# Altium PCB MRX80SAQUARE.PcbDoc
Units mm, origin at the board's own origin, x right, y up, seen from the top; angles counter-clockwise.
Board outline 25.65 x 25.65 mm, 2 copper layers (Top Layer, Bottom Layer); 40 components, 25 nets, 98 pads, 16 vias.
Unrouted connection lines stored in the file: 1.
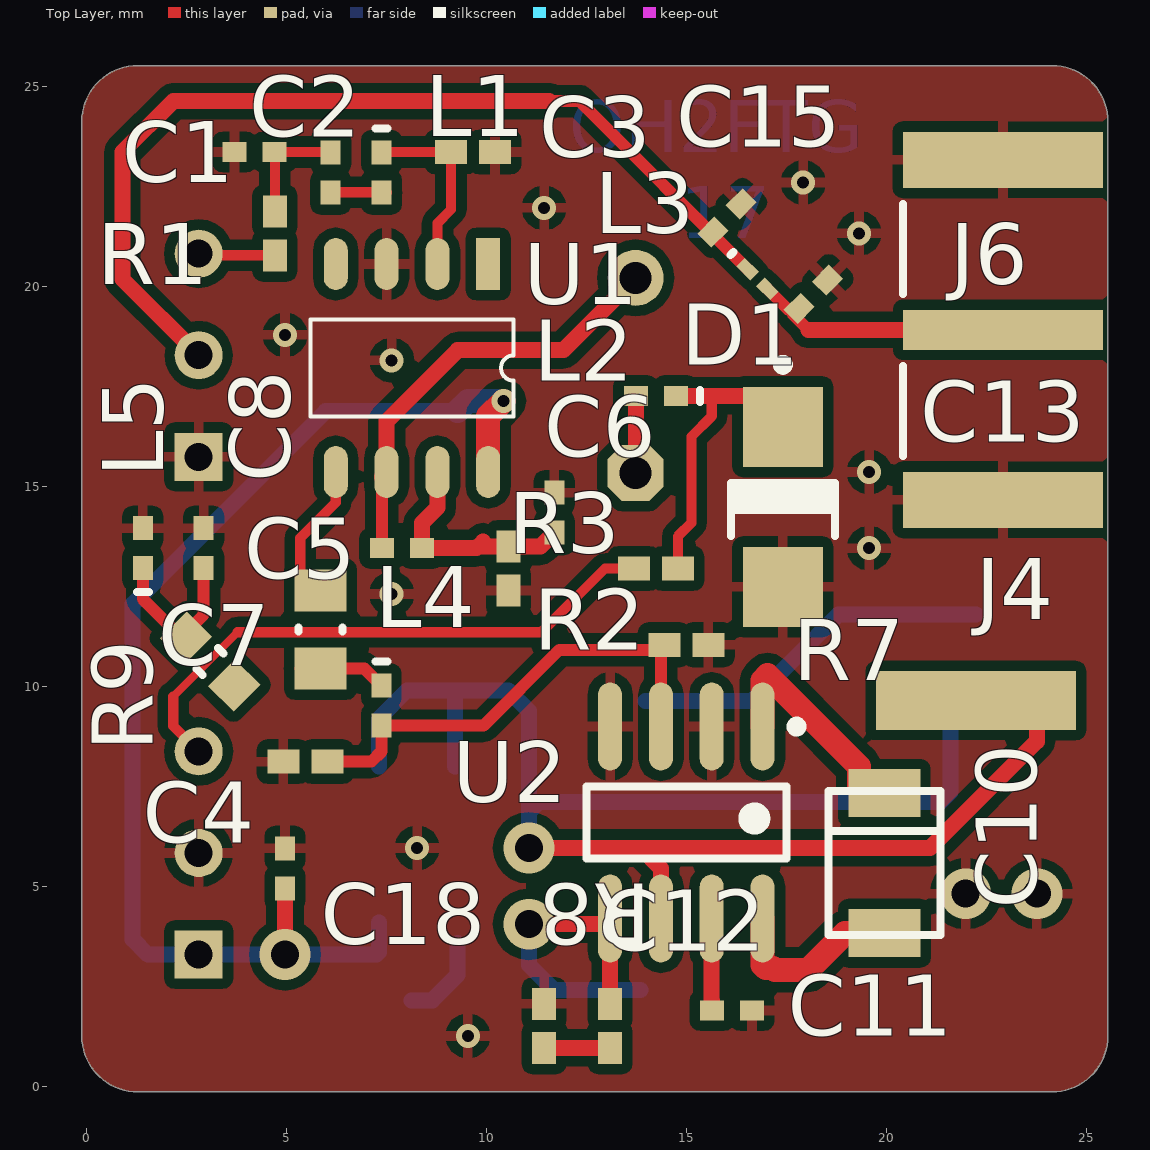
[diagram p0: Top Layer view]
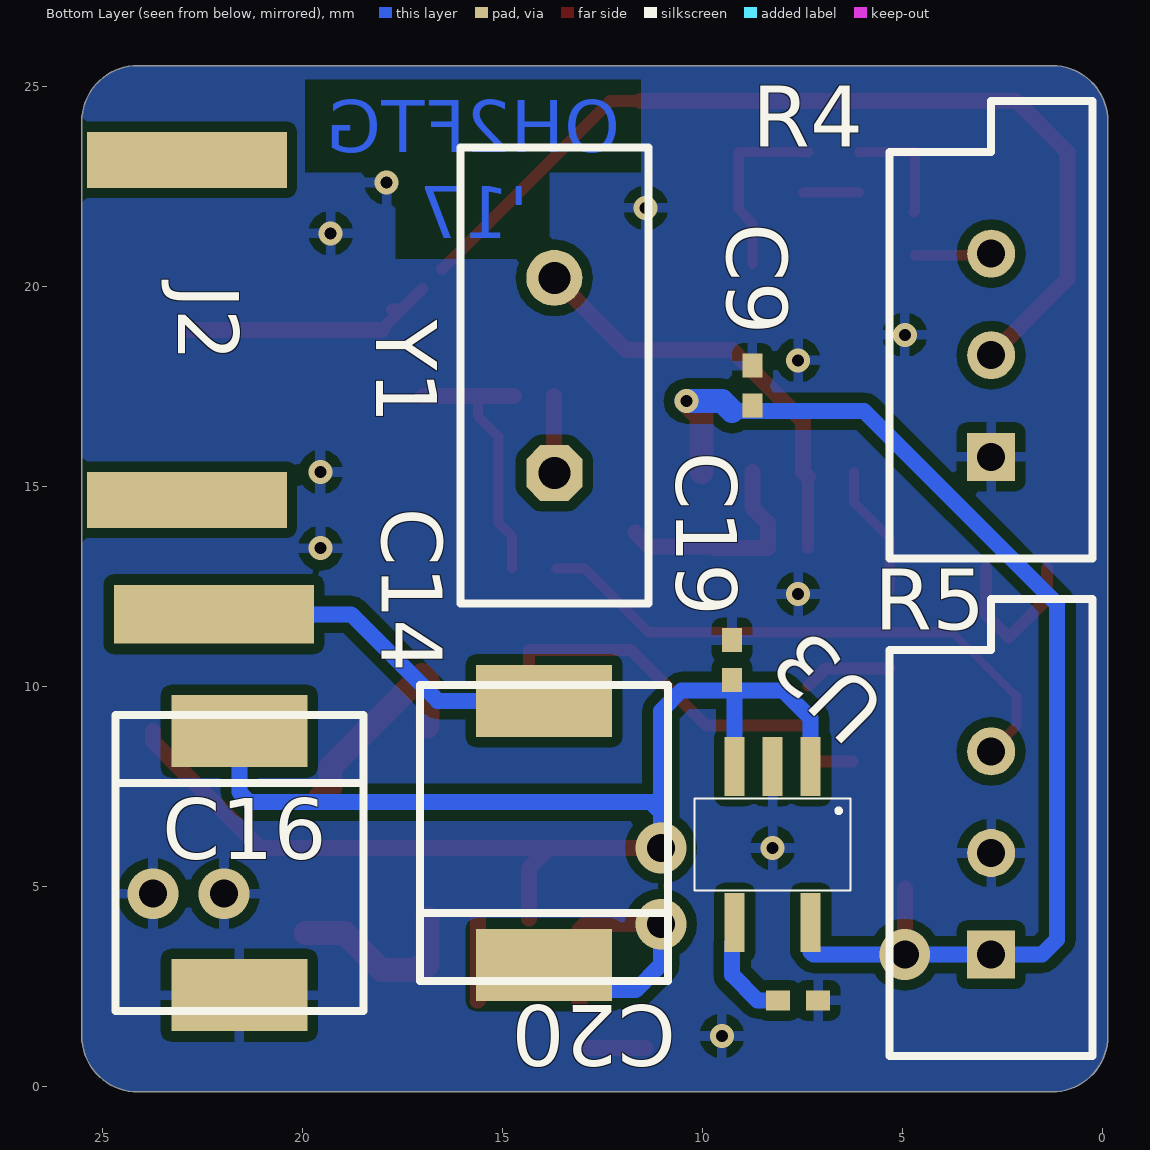
[diagram p1: Bottom Layer view, seen from below]

## Layer stack, top to bottom
Top Solder: solder mask 0.0102, Solder Resist, Dk 3.5
Top Layer: signal copper 0.0356
Dielectric 1: dielectric 0.32, FR-4, Dk 4.8
Bottom Layer: signal copper 0.0356
Bottom Solder: solder mask 0.0102, Solder Resist, Dk 3.5

## Board outline
-0.127,1.27 -0.127,24.13 cw(c1.27,24.13) 1.27,25.527 24.13,25.527 cw(c24.13,24.13) 25.527,24.13 25.527,1.27 cw(c24.13,1.27) 24.13,-0.127 1.27,-0.127 cw(c1.27,1.27)

## Design rules (kind name [scope] priority, off if disabled: settings)
Clearance [All] p1: gap=0.254 ignorepadtopadclearanceinfootprint=FALSE except(0: Arc-Hole Track-Hole SMDPad-Hole THPad-Hole Via-Hole Fill-Hole Poly-Hole Region-Hole Text-Hole)
PolygonConnect [All] p1: connectstyle=Relief reliefconductorwidth=0.254 reliefentries=4 polygonreliefangle="90 Angle" airgapwidth=0.254
RoomDefinition MRX80SQUARE [InComponentClass('MRX80SQUARE')] p1: confinementstyle=ConfineIn formatcopy=TRUE lockcomponents=FALSE outline 42.164,1.397 82.55,1.397 82.55,19.05 42.164,19.05
RoutingVias [All] p1: holewidth=0.711 width=1.27 viastyle="Through Hole" minholewidth=0.711 minwidth=1.27 maxholewidth=0.711 maxwidth=1.27
SolderMaskExpansion [All] p1: expansion=0.102
Width [All] p1: maxlimit=6.254 minlimit=0.254 preferedwidth=0.254
30 further rules are at their usual default settings.

## Components (designator, comment, footprint, x,y, rotation, side; value= is the part's Value field where it differs from the comment)
C1 "Cap Semi" 0402 4.191,23.368 r0 top value=910pF
C2 "Cap Semi" 0402 6.096,22.86 r270 top value=180pF
C3 "Capacitor" CAPC1005X04N_0402 9.652,23.368 r180 top value=100n
C4 "Capacitor" CAPC1005X04N_0402 5.461,8.128 r180 top value=100n
C5 "Cap Semi" 0402 7.874,13.462 r0 top value=270pF
C6 "Cap Semi" 0402 11.684,14.351 r270 top value=82pF
C7 "Capacitor" CAPC2012X06N_0806 5.842,11.43 r90 top value=100n
C8 "Cap Semi" 0402 2.921,13.462 r90 top value=390pF
C9 "Cap Semi" 0402 8.763,17.526 r90 bottom value=2.2uF
C10 "Capacitor" CAP_CASE_B_1210_m3225 19.939,5.588 r270 top value=10u
C11 "Cap Semi" 0402 16.129,1.905 r0 top value=2.2uF
C12 "Capacitor" CAPC1005X04N_0402 13.081,1.524 r90 top value=100n
C13 "Cap Semi" 0402 18.161,19.812 r225 top value=820pF
C14 "Capacitor" CAP_CASE_V_2924_m7361-38 13.97,6.348 r90 bottom value=100u
C15 "Cap Semi" 0402 16.002,21.717 r225 top value=820pF
C16 "Capacitor" CAP_CASE_V_2924_m7361-38 21.59,5.588 r270 bottom value=100u
C18 "Cap Semi" 0402 4.953,5.461 r270 top value=2.2uF
C19 "Cap Semi" 0402 9.271,10.668 r270 bottom value=2.2uF
C20 "Cap Semi" 0402 7.62,2.159 r0 bottom value=10nF
D1 "MRA4007T3" ONSC-SMA-2-403D-02_V 17.399,14.499 r270 top
J2 "pad_smd" pad_smd_bodge 22.225,11.811 r0 bottom
J4 "pad_smd" pad_smd_bodge 22.225,9.652 r0 top
J6 "SMA" ROS-32K145-400L5_V 25.4,18.923 r270 top
L1 "Inductor" 0402-A 7.366,22.86 r270 top value=1.3uH
L2 "Inductor" 0402-A 14.224,17.272 r180 top value=15uH
L3 "Inductor" 0603 16.764,20.193 r315 top value=2.2uH
L4 "Inductor" 0402-A 7.366,9.525 r270 top value=15uH
L5 "Inductor" 0402-A 1.397,13.462 r90 top value=1.3uH
R1 "Resistor" RESC1005X04N_0402 4.699,21.336 r90 top value=47ohm
R2 "Resistor" RESC1005X04N_0402 10.541,12.954 r90 top value=10k
R3 "Resistor" RESC1005X04N_0402 14.224,12.954 r180 top value=100k
R4 "RPot" VR5 2.794,18.288 r90 bottom value=10K
R5 "RPot" VR5 2.794,5.842 r90 bottom value=10K
R7 "Resistor" RESC1005X04N_0402 14.986,11.049 r180 top value=10k
R8 "Resistor" RESC1005X04N_0402 11.43,1.524 r270 top value=10k
R9 "Resistor" RESC1608X06N_0603 3.082,10.634 r315 top value=1.5k
U1 "SA612AD" SO8_SOIC8 10.033,20.567 r270 top
U2 "LM386M-1" M08A_N 14.986,6.604 r270 top
U3 "LP2985IM5-6.1/NOPB" SOT23-5 7.305,8.001 r0 bottom
Y1 "ECS-10-13-1" HC-49U 13.716,17.78 r90 bottom

## Footprints (in the part's own frame and the unit in brackets; to place one, negate y for a bottom-side part, rotate by r counter-clockwise, add the part's x,y. Pads: shape width x height; smd on the part's side, far side on the other; paste and mask are expansions set on the pad)
0402 [mm] "Chip Capacitor, Body 1.0x0.5mm, IPC High Density"
  rect 0.6x0.5 smd: 1(-0.5,0) 2(0.5,0)
  body extent -0.55,-0.3 0.55,0.3, height 1.3
0402-A [mm] "Chip Inductor, Body 1.0x0.5mm, IPC High Density"
  rect 0.6x0.5 smd: 1(-0.5,0) 2(0.5,0)
  silkscreen extent -1.1,-0.15 -1.1,0.15, body extent -0.55,-0.3 0.55,0.3, height 0.55
0603 [mm] "Chip Inductor, Body 0.6x0.3mm, IPC High Density"
  rect 0.5x0.3 smd: 1(-0.35,0) 2(0.35,0)
  silkscreen extent -0.9,-0.05 -0.9,0.05, body extent -0.33,-0.18 0.33,0.18, height 0.55
CAP_CASE_B_1210_m3225 [mm] "Chip Capacitor Case B, 2-Leads, Body 3,5x2,8x1.9mm"
  rect 1.2x1.8 smd: 1(-1.75,0) 2(1.75,0)
  silkscreen extent -1.8,-1.4 1.8,1.4, body extent -1.75,-1.4 1.75,1.4, height 1.9
CAP_CASE_V_2924_m7361-38 [mm]
  rect 1.8x3.4 smd: 1(-3.3,0) 2(3.3,0)
  silkscreen extent -3.7,-3.1 3.7,3.1, body extent -4.05,-3.1 4.05,3.1, height 3.6
CAPC1005X04N_0402 [mm]
  rect 0.8x0.6 smd: 1(-0.55,0) 2(0.55,0)
  body extent -0.52,-0.28 0.53,0.27, height 0.4
CAPC2012X06N_0806 [mm] "Chip Capacitor, 2-Leads, Body 2,00x1,25mm, IPC Medium Density"
  rect 1.05x1.3 smd: 1(-0.975,0) 2(0.975,0)
  silkscreen extent -0.05,-0.55 0.05,0.55, body extent -1.05,-0.67 1.05,0.68, height 0.6
HC-49U [mm] "Quartz Crystal, Thru-Hole; 2 Leads; Body 11.35 x 4.65 x 13.46 mm (LxWxH max)"
  oct 1.4x1.4 hole 0.8: 1(-2.44,0)
  round 1.4 hole 0.8: 2(2.44,0)
  silkscreen extent -5.7,-2.35 5.7,2.35
M08A_N [mm] "SOIC, 8-Leads, Body 4.9x3.9mm, Pitch 1.27mm, IPC Medium Density"
  oval 2.2x0.6 smd: 1(-2.4,1.905) 2(-2.4,0.635) 3(-2.4,-0.635) 4(-2.4,-1.905) 5(2.4,-1.905) 6(2.4,-0.635) 7(2.4,0.635) 8(2.4,1.905)
  silkscreen extent -2.52,-2.5 0.9,2.88, body extent -2,-2.5 2,2.5, height 1.75
ONSC-SMA-2-403D-02_V [mm] "Molded, 2-Leads, Body 4.57x2.92mm"
  rect 2x2 smd: 1(-2,0) 2(2,0)
  silkscreen extent -3.67,-1.3 0.74,1.3, body extent -2.16,-1.3 2.16,1.3, height 2.2
pad_smd_bodge [mm] "A surface only pad for future bodge-wires"
  rect 5x1.473 smd: 1(0,0)
RESC1005X04N_0402 [mm] "Chip Resistor, 2-Leads, Body 1,00x0,50mm, IPC Medium Density"
  rect 0.8x0.6 smd: 1(-0.55,0) 2(0.55,0)
  body extent -0.52,-0.28 0.53,0.27, height 0.4
RESC1608X06N_0603 [mm] "Chip Resistor, 2-Leads, Body 1,60x0,80mm, IPC Medium Density"
  rect 0.9x0.95 smd: 1(-0.85,0) 2(0.85,0)
  silkscreen extent -0.1,-0.38 0.1,0.38, body extent -0.85,-0.45 0.85,0.45, height 0.55
ROS-32K145-400L5_V [mm] "SMA Right Angle Jack, Edge Mount, 14.25x9.5x4.46mm, Rosenberger Recommended"
  rect 1x5 smd: 1(0,-2.5)
  rect 1.4x5 smd: MP(-4.25,-2.5) MP(4.25,-2.5)
  rect 1.4x5 smd far side paste-2: ""(-4.25,-2.5) ""(4.25,-2.5)
  silkscreen extent -3.15,-5 3.15,-5, body extent -4.75,-4.75 4.75,9.5, height 4.46
SO8_SOIC8 [mm]
  rect 1.3x0.6 smd: 1(0,0)
  oval 1.3x0.6 smd: 2(0,-1.27) 3(0,-2.54) 4(0,-3.81) 5(5.2,-3.81) 6(5.2,-2.54) 7(5.2,-1.27) 8(5.2,0)
  silkscreen extent 1.38,-4.44 3.82,0.64
SOT23-5 [mm] "SOT23-5 case"
  rect 0.5x1.473 smd: 1(0,0) 2(0.95,0) 3(1.9,0) 4(1.9,3.9) 5(0,3.9)
  silkscreen extent -1,0.8 2.9,3.1
VR5 [mm] "Thru-Hole; 3 Leads"
  rect 1.2x1.2 hole 0.7: 1(-2.54,0)
  round 1.2 hole 0.7: 2(0,0) 3(2.54,0)
  silkscreen extent -5.08,-2.54 6.35,2.54

## Part data
C1 C2 C5 C6 C8 C9 C11 C13 C15 C18 C19 C20: "Capacitor (Semiconductor SIM Model)", LatestRevisionDate=29-May-2009, LatestRevisionNote="IPC-7351 Footprint Added.", PackageDescription="Chip Capacitor", PackageReference=C1206, Published=8-Jun-2000, Publisher="Altium Limited"
C3 C4 C12: library part Capacitor_100n_0402_Bulk, "Class 1 SMD Capacitor", Manufacturer=MULTICOMP, ManufacturerRef=MC0402B104K250CT, PowerRating=N.A., TemperatureCoeff="± 15%", Tolerance="± 10%", Voltage=25V, OrderCode=2310482, PackageDescription=SMD, PackageReference=SMD-0402, PriceEuro=0.0055, Published=9.5.2014, Publisher=atr, Seller=Farnell, Type=X7R
C7: library part Capacitor_47n_0805_C0G, "Class 1 SMD Capacitor", Manufacturer=Kemet, ManufacturerRef=C0805C473J3GACTU, PowerRating=N.A., TemperatureCoeff="0ppm/°C ± 30ppm/°C", Tolerance="± 5%", Voltage=25V, OrderCode=1535570RL, PackageDescription=SMD, PackageReference=SMD-0805, PriceEuro=0.28, Published=9.5.2014, Publisher=atr, Seller=Farnell, Type="C0G / NP0"
C10: library part Capacitor_100u_Tant_SMD_CASE_B_m3525, "Tant SMD Capacitor", Manufacturer=AVX, ManufacturerRef=TPSB107M010R0400, PowerRating=N.A., TemperatureCoeff=-, TemperatureRange="-55°C to +125°C", Tolerance="± 20%", Voltage=15V, ESR=0.4Ohm, OrderCode=1658510RL, PackageDescription="CASE B", PackageReference="SMD-1210 [3225 Metric]", PriceEuro=0.89, Published=15.5.2014, Publisher=atr, Seller=Farnell, Type=Tant
C14 C16: library part Capacitor_100u_Tant_SMD_CASE_V_m7361, "Tant SMD Capacitor", Manufacturer=AVX, ManufacturerRef=TPSV107K025R0100, PowerRating=N.A., TemperatureCoeff=-, TemperatureRange="-55°C to +125°C", Tolerance="± 20%", Voltage=25V, ESR=0.1Ohm, LatestRevisionDate=3.9.2014, LatestRevisionNote=3.9.2014, OrderCode=1659002, PackageDescription="CASE V", PackageReference="SMD-2924 [7361 Metric]", PriceEuro=4.94, Published=3.9.2014, Publisher=atr, Seller=Farnell, Type=Tant
D1: "Surface Mount Standard Recovery Power Rectifier, 2-Pin SMA, Tape and Reel", Manufacturer="On Semiconductor", Supplier Part Number 1=MRA4007T3OSTR-ND, ComponentLink1Description="Manufacturer URL", ComponentLink1URL=http://www.onsemi.com/, ComponentLink2Description=Datasheet, ComponentLink2URL=http://www.onsemi.com/pub_link/Collateral/MRA4003T3-D.PDF, ComponentLink3Description="Package Specification", ComponentLink3URL=http://www.onsemi.com/pub_link/Collateral/403D-02.PDF, DatasheetVersion="Rev. 9", IFSM Max (A)=30, IO(rec) Max (A)=1, Mounting Technology="Surface Mount", PackageDescription="2-Pin Small Molded Package, J-Bend Lead, Body 2.605 x 4.315 mm", PackageReference=SMA-2-403D-02, PackageVersion="Rev. G, 07/2012", Packing="Tape and Reel", PartNumber=MRA4007T3, RoHS=FALSE, Supplier 1=Digi-Key, Supplier 2=Digi-Key, Supplier 3=Digi-Key, Supplier Part Number 2=MRA4007T3OSCT-ND, Supplier Part Number 3=MRA4007T3OSDKR-ND, Type="Standard Recovery", VRRM Max (V)=1000
J2 J4: library part pad_smd_1mm*2mm, "1mm * 2mm smd pad"
J6: library part 32K145-400L5, "SMA Right Angle Jack, Edge Mount, Up to 18 GHz, -55 to 155 degC", ComponentLink1Description="Manufacturer URL", ComponentLink1URL=http://www.rosenberger.de, ComponentLink2Description=Datasheet, ComponentLink2URL=http://rosenberger.de/ok/images/documents/db/32K145-400L5.pdf, ComponentLink3Description="Package Specification", ComponentLink3URL=http://rosenberger.de/ok/images/documents/db/32K145-400L5.pdf, ComponentLink4Description="Series Overview / Design Note", ComponentLink4URL=http://rosenberger.de/ok/images/documents/spez/32.pdf, ComponentLink5Description="Webshop / RFQ", ComponentLink5URL=http://www.rosenberger.com/en/contact/sales/, DatasheetVersion=b00, Desgin Note 2="For more information about DRC setting, please look at following webpage, http://techdocs.altium.com/display/SCRT/Design+Rule+for+Edge-Mount+Connectors", Design Note 1="Footprint in library is a generic example - only application specific footprint delivers High Performance", Mounting Technology="Surface Mount", PackageDescription="SMA Right Angle Jack, Edge Mount, 14.25 x 9.5 x 4.46 mm", PackageReference=32K145-400L5, PackageVersion=b00, PartNumber=32K145-400L5
R1 R2 R3 R7 R8 R9: library part Resistor_SMD_Generic, "Generic SMD Resistor", Manufacturer=SUSUMU, ManufacturerRef=RR0816P-104-B-T5, PowerRating=63mW, TemperatureCoeff="± 25ppm/°C", Tolerance="± 0.1%", Voltage=75V, OrderCode=1653254RL, PackageDescription=SMD, PackageReference=SMD-0603, PriceEuro=0.085, Publisher=atr, Seller=Farnell, Type="Thin Film"
R4 R5: "Potentiometer", LatestRevisionDate=17-Jul-2002, LatestRevisionNote="Re-released for DXP Platform.", PackageDescription="Variable Resistor, Thru-Hole; 3 Leads", PackageReference=VR5, Published=8-Jun-2000, Publisher="Altium Limited", Set Position=0.5, Sim Note="Enter the Resistance value and the set point into parameter fields."
U1: Input Frequency=500MHz, Manufacturer 1="NXP Semiconductors", Manufacturer Part Number 1=SA612AD/01,118, Operating Temperature (Max)=85C, Operating Temperature (Min)=-40C, Operating Temperature Classification=Industrial, Package Type=SO, Power Gain=17dB, ComponentLink1Description=https://datasheet.ciiva.com/27052/1460068-27052253.pdf, ComponentLink1URL=https://datasheet.ciiva.com/27052/1460068-27052253.pdf, ComponentLink2Description=https://datasheet.ciiva.com/15100/getdatasheetpartid-117259-15100947.pdf, ComponentLink2URL=https://datasheet.ciiva.com/15100/getdatasheetpartid-117259-15100947.pdf, ComponentLink3Description=https://datasheet.ciiva.com/3271/sa612a-3271368.pdf, ComponentLink3URL=https://datasheet.ciiva.com/3271/sa612a-3271368.pdf, Packaging="Tape and Reel", Pricing 1="1=2.34, 10=1.92, 50=1.92, 100=1.54, 1000=1.11, 10000=0.998 (USD)", Stock 1=1993, Supplier 1=Mouser, Supplier Part Number 1=SA612AD
U2: "Low Voltage Audio Power Amplifier, 8-pin Narrow SOIC", Manufacturer="National Semiconductor", PackageTopMarking=NSZXTT*LM386*M-1, PowerWise=N, Code_IPC=SOIC127P600-8, Code_JEDEC=MS-012-AA, ComponentLink1Description="Manufacturer URL", ComponentLink1URL=http://www.national.com/, ComponentLink2Description="LM386 Datasheet", ComponentLink2URL=http://www.national.com/ds/LM/LM386.pdf, ComponentLink3Description="LM386 Web Page", ComponentLink3URL=http://www.national.com/pf/LM/LM386.html, ComponentLink4Description="M08A Package Page", ComponentLink4URL=http://www.national.com/packaging/folders/m08a.html, CompType="Audio IC", DatasheetVersion=Aug-2000, High-Reliability=Y, PackageDescription="SOIC Narrow, 4.9 x 3.9 x 1.45mm, 8 Lead, 1.27mm Pitch", PackageReference=M08A, PackageVersion="revM, May-2009", PartNumber=LM386M-1, PinCount=8, RoHS=N
U3: "6.1V 150mA LDO", Manufacturer 1="Texas Instruments", Maximum Input Voltage="16 V", Maximum Output Current="0.15 A", Minimum Input Voltage="2.5 V", Operating Temperature="-40 to 125 °C", Output Voltage="6.1 V", Package=5SOT-23, Supplier Part Number 1=926-LP2985IM561NOPB, Typical Dropout Voltage @ Current="0.0001@0mA|0.007@1mA|0.04@10mA|0.12@50mA|0.28@150mA V", Accuracy="±3 %", Category="Linear Regulator", ComponentLink1Description=https://datasheet.ciiva.com/6592/lp2985-n-6592025.pdf, ComponentLink1URL=https://datasheet.ciiva.com/6592/lp2985-n-6592025.pdf, ComponentLink2Description=https://datasheet.ciiva.com/26168/lp2985-n-26168191.pdf, ComponentLink2URL=https://datasheet.ciiva.com/26168/lp2985-n-26168191.pdf, ComponentLink3Description=https://datasheet.ciiva.com/6592/lp2985-n-6592022.pdf, ComponentLink3URL=https://datasheet.ciiva.com/6592/lp2985-n-6592022.pdf, ComponentLink4Description=https://datasheet.ciiva.com/13028/lp2985-n-13028680.pdf, ComponentLink4URL=https://datasheet.ciiva.com/13028/lp2985-n-13028680.pdf, Line Regulation="0.014 %/V", Manufacturer Part Number 1=LP2985IM5-6.1/NOPB, Mounting="Surface Mount", Number of Outputs=1, Output Type=Fixed, Packaging="Tape & Reel", Polarity=Positive, Pricing 1="1=0.76, 10=0.632, 50=0.632, 100=0.408, 1000=0.326, 10000=0.265 (USD)", Rad Hard=No, Stock 1=539, Supplier 1=Mouser, Type=Linear
Y1: "Crystal Oscillator", ComponentLink1Description="Manufacturer Link", ComponentLink1URL=http://www.ecsxtal.com/, ComponentLink2Description=Datasheet, ComponentLink2URL=http://www.ecsxtal.com/pdf2/HC49U.PDF, DatasheetDocument=18-Apr-2000, PackageReference=HC-49U, Published=17-Jul-2002, Publisher="Altium Limited"
L1 L2 L3 L4 L5: Code_IEC=1005, Code_JEITA=0402, LatestRevisionDate=29-May-2009, LatestRevisionNote="IPC-7351 Footprint Added.", PackageDescription="Chip Inductor", PackageReference=0402-A, Published=8-Jun-2000, Publisher="Altium Limited"

## Via types
v1: diameter 0.6, hole 0.3, Top Layer to Bottom Layer, 11 vias
v2: diameter 1.27, hole 0.7, Top Layer to Bottom Layer, 5 vias

## Nets (pads, with @x,y where several pads share a name; then routed paths per layer and width w, separated by ;. In a path a pad name is that pad's centre, name@x,y a point inside that pad or via, vN(x,y) a via of type N, cw(c..) or ccw(c..) an arc to the next point about the centre after c; other vN are vias at no path point)
GND: C1.1 C3.1 C4.2 C6.1 C8.2 C9.2 C11.2 C13.1 C15.1 C16.2 C18.1 C19.1 C20.1 D1.2 J6.MP L5.2 R2.1 R4.1 R5.2 R7.1 R8.1 U1.3 U2.2 U2.4 U3.2
  other v1: 9.525,1.27 8.255,5.969 7.62,12.319 19.558,13.462 19.558,15.367 7.62,18.161 4.953,18.796 19.304,21.336 11.43,21.971 17.907,22.606
  other v2: 21.971,4.826 23.749,4.826
NetC1_2: C1.2 C2.1 R1.2 | length 2.9
  Top Layer w0.254: R1.2@4.733,21.852 R1.2 4.699,23.36 C1.2 6.088,23.368 C2.1
NetC2_2: C2.2 L1.2 | length 1.4
  Top Layer w0.254: C2.2 7.382,22.36 7.374,22.352 L1.2@7.501,22.352
NetC3_2: C3.2 L1.1 U1.2 | length 4.7
  Top Layer w0.254: L1.1 7.374,23.368 C3.2 9.102,21.929 8.763,21.59 U1.2
NetC4_1: C4.1 L4.2 R7.2 U2.3 | length 11.5
  Top Layer w0.3: C4.1@6.265,8.128 7.112,8.128 7.366,8.382 L4.2 9.914,9.025 11.811,10.922 14.351,10.922 U2.3
NetC5_1: C5.1 U1.6 Y1.2 | length 10.9
  Top Layer w0.3: C5.1 U1.6@7.374,15.248
  Top Layer w0.4: U1.6@7.374,15.248 U1.6 7.493,16.637 9.271,18.415 11.911,18.415 Y1.2
NetC5_2: C5.2 C6.2 R2.2 U1.7 | length 5.6
  Top Layer w0.4: U1.7 8.763,14.478 8.374,14.089 C5.2 9.737,13.462 9.906,13.631 ; 9.906,13.504 11.337,13.504 C6.2
NetC7_1: C7.1 L4.1 R9.2 | length 2.2
  Top Layer w0.3: C7.1@5.334,10.455 6.936,10.455 L4.1
NetC7_2: C7.2 U1.5 | length 3.3
  Top Layer w0.254: C7.2@5.334,12.405 5.334,13.716 6.223,14.605 U1.5
NetC8_1: C8.1 L5.1 R9.1 | length 4.1
  Top Layer w0.3: L5.1 1.397,12.192 2.354,11.235 2.921,11.802 C8.1
NetC10_1: C10.1 U2.1 | length 5.4
  Top Layer w0.6: U2.1 16.891,10.16 17.018,10.287 19.304,8.001 19.304,7.493 C10.1@19.558,7.239
NetC10_2: C10.2 U2.8 | length 4.6
  Top Layer w0.6: U2.8 16.891,3.048 16.976,2.963 17.158,2.963 17.2,2.921 18.034,2.921 18.951,3.838 C10.2
NetC11_1: C11.1 U2.7 | length 2
  Top Layer w0.4: U2.7 15.621,2.167 15.629,2.159
NetC12_1: C12.1 R8.2 | length 1.7
  Top Layer w0.4: R8.2 C12.1
NetC12_2: C12.2 C14.1 U2.5 | length 8
  Top Layer w0.4: v2(11.049,4.064) 12.941,4.064 13.081,3.924 C12.2
  Bottom Layer w0.4: v2(11.049,4.064) 11.049,3.048 11.682,2.415 C14.1@13.843,2.415
NetC13_2: C13.2 J6.1 L3.2 | length 6.4
  Top Layer w0.3: L3.2 17.523,19.434 C13.2@17.775,19.434 ; C13.2@17.649,19.308 18.034,18.923
  Top Layer w0.4: 18.034,18.923 J6.1
NetC14_2: C14.2 J2.1 | length 9.2
  Bottom Layer w0.4: C14.2 16.633,9.648 18.796,11.811 J2.1
NetC15_2: C15.2 L3.1 R4.2 | length 23.8
  Top Layer w0.3: 11.557,24.638 12.319,24.638 L3.1
  Top Layer w0.4: R4.2 0.889,20.193 0.889,23.368 2.159,24.638 11.557,24.638
NetC20_2: C20.2 U3.4 | length 2.2
  Bottom Layer w0.4: C20.2 8.636,2.159 9.271,2.794 U3.4@9.271,3.598
NetD1_1: D1.1 L2.1 R3.1 | length 7
  Top Layer w0.254: R3.1 14.774,13.758 15.113,14.097 15.113,16.256 15.621,16.764 15.621,17.272 ; D1.1@16.986,17.272 D1.1@17.018,17.24
  Top Layer w0.4: L2.1 15.621,17.272 D1.1@16.986,17.272
NetL2_2: L2.2 Y1.1 | length 1.9
  Top Layer w0.254: Y1.1 13.708,15.348 Y1.1@13.724,15.364
  Top Layer w0.4: Y1.1@13.724,15.364 L2.2
NetR1_1: R1.1 R4.3 | length 1.9
  Top Layer w0.254: R4.3 2.836,20.786 R1.1
NetR3_2: R3.2 R5.3 | length 14.5
  Top Layer w0.2: 2.159,9.752 3.768,11.361
  Top Layer w0.254: 2.159,9.752 2.159,9.017 R5.3 ; 3.768,11.361 11.361,11.361 12.954,12.954 R3.2
RVCC: C16.1 C19.2 J4.1 U2.6 U3.1 U3.3 | length 39.1
  Top Layer w0.4: v2(11.049,5.969) 13.843,5.969 ; U2.6 14.351,5.461 13.843,5.969 ; 23.749,8.89 23.749,8.636 21.082,5.969 13.843,5.969
  Bottom Layer w0.4: U3.1 7.305,9.21 8.001,9.906 C19.2@9.144,9.906 ; U3.3 9.205,9.845 C19.2@9.144,9.906 ; v2(11.049,5.969) 11.049,6.858 ; C16.1 21.59,7.366 21.336,7.112 11.303,7.112 11.049,6.858 ; C19.2@9.144,9.906 10.536,9.906 11.044,9.398 11.049,9.398 11.049,6.858
VCC: C9.1 C18.2 R5.1 U1.8 U3.5 | length 30.4
  Top Layer w0.4: v2(4.953,3.302) C18.2
  Top Layer w0.6: U1.8 10.033,16.764 v1(10.414,17.145)
  Bottom Layer w0.4: U3.5 7.305,3.368 7.239,3.302 v2(4.953,3.302) R5.1 1.524,3.302 1.143,3.683 1.143,12.065 5.969,16.891 9.271,16.891
  Bottom Layer w0.6: 9.271,16.891 9.525,17.145 v1(10.414,17.145)
pads on no net: J6. U1.1 U1.4

## Polygon pours and split planes (outlines as drawn)
GND on Bottom Layer "Bottom Layer-GND" (solid, pour order 1): -0.127,1.27 -0.127,24.13 cw(c1.27,24.13) 1.27,25.527 24.13,25.527 cw(c24.13,24.13) 25.527,24.13 25.527,1.27 cw(c24.13,1.27) 24.13,-0.127 1.27,-0.127 cw(c1.27,1.27)
GND on Top Layer "Top Layer-GND" (solid, pour order 0): -0.127,1.27 -0.127,24.13 cw(c1.27,24.13) 1.27,25.527 24.13,25.527 cw(c24.13,24.13) 25.527,24.13 25.527,1.27 cw(c24.13,1.27) 24.13,-0.127 1.27,-0.127 cw(c1.27,1.27)

## Other copper
Bottom Layer:
  text "OH2FTG" at 12.065,23.368 h1.3
  text "'17" at 14.351,21.209 h1.3

## Silkscreen, mask and mechanical layers (free items; w line width, h text height)
Mechanical 1:
  lines w0.254: 0,13.081 0,24.13 cw(c1.27,24.13) 1.27,25.4 24.13,25.4 cw(c24.13,24.13) 25.4,24.13 25.4,1.27 cw(c24.13,1.27) 24.13,0 1.27,0 cw(c1.27,1.27) 0,1.27 0,13.208

## Dimensions
1.27,25.4 to 1.27,0 on Mechanical 13
0,24.13 to 25.4,24.13 on Mechanical 13

## Text inside footprints (layer, text, board x,y; h text height)
J6: Mechanical 3 "Board Edge" at 25.4,27.023 h0.2 r270